# EAGLE board CT_schematic (EAGLE 7.6.0)

Size 100 x 80 mm. Coordinates in mm from the lower left corner, seen from the top.
Outline: 0,0 100,0 100,80 0,80 0,0
Copper layers (1*16): Top 0.035mm / dielectric 1.5mm / Bottom 0.035mm
Design rules "default": minimum track width 10mil, minimum drill 24mil, track to track 8mil, track to pad 8mil, pad to pad 8mil, via to via 8mil, smd to smd 8mil, copper to edge 40mil, drill to drill 8mil, minimum pad ring 10mil, minimum via ring 8mil, stop-mask expansion 4mil, vias tented up to drill 0mil, thermal gap 10mil

## Footprints (pad centres in the part's own frame; a part is rotated, then mirrored left to right if it is on the bottom)
C0603 = smd 0.8 x 0.8: 1 -0.762,0; 2 0.762,0
C0402 = smd 0.5 x 0.5: 1 -0.508,0; 2 0.508,0
C1210 = smd 1.2 x 2.5: 1 -1.524,0; 2 1.524,0
C1206 = smd 1.3 x 1.6: 1 -1.524,0; 2 1.524,0
L0603 = smd 0.8 x 0.8: 1 -0.762,0; 2 0.762,0
R0603 = smd 0.8 x 0.8: 1 -0.762,0; 2 0.762,0
WLCSP25 = smd 0.32 x 0.32: A1 -0.8,0.8; A2 -0.4,0.8; A3 0,0.8; A4 0.4,0.8; A5 0.8,0.8; B1 -0.8,0.4; B2 -0.4,0.4; B3 0,0.4; B4 0.4,0.4; B5 0.8,0.4; C1 -0.8,0; C2 -0.4,0; C3 0,0; C4 0.4,0; C5 0.8,0; D1 -0.8,-0.4; D2 -0.4,-0.4; D3 0,-0.4; D4 0.4,-0.4; D5 0.8,-0.4; E1 -0.8,-0.8; E2 -0.4,-0.8; E3 0,-0.8; E4 0.4,-0.8; E5 0.8,-0.8
ETRX3587 = smd 1 x 1.4: 1 0,0; 2 1.27,0; 3 2.54,0; 4 3.81,0; 5 5.08,0; 6 6.35,0; 7 7.62,0; 8 8.89,0; 9 10.16,0; 10 11.43,0; 11 12.7,0; 12 13.97,0; 13 15.24,0; 14 16.51,0; 15 17.78,0; 16 19.05,0; 17 20.32,0; 18 21.59,0; 19 22.86,0; 20 22.86,18.8; 21 21.59,18.8; 22 20.32,18.8; 23 19.05,18.8; 24 17.78,18.8; 25 16.51,18.8; 26 15.24,18.8; 27 13.97,18.8; 28 12.7,18.8; 29 11.43,18.8; 30 10.16,18.8; 31 8.89,18.8; 32 7.62,18.8; 33 6.35,18.8
DFN8-S = smd 0.6 x 0.4: 1 -2.69,1.905; 2 -2.69,0.635; 3 -2.69,-0.635; 4 -2.69,-1.905; 5 2.69,-1.905; 6 2.69,-0.635; 7 2.69,0.635; 8 2.69,1.905
ABS07-32.768KHZ-7-T = smd 1.1 x 2.4: 1 -2.5,0; 2 0,0
ASFL1 = smd 1.7 x 1.5: 1 -1.27,-1.1; 2 1.27,-1.1; 3 1.27,1.1; 4 -1.27,1.1
SOIC-8_EP = smd 1.6 x 0.533: 1 -2.921,1.905; 2 -2.921,0.635; 3 -2.921,-0.635; 4 -2.921,-1.905; 5 2.921,-1.905; 6 2.921,-0.635; 7 2.921,0.635; 8 2.921,1.905 | smd 2.54 x 3.302: EPAD 0,0 | drill 0.406 pad 0.406: P$1 -0.508,0.635; P$2 0.381,0.635; P$3 -0.508,-0.635; P$4 0.381,-0.635
DFN8_2X3MC = smd 0.813 x 0.305: 1 -1.398,0.75; 2 -1.398,0.25; 3 -1.398,-0.25; 4 -1.398,-0.75; 5 1.398,-0.75; 6 1.398,-0.25; 7 1.398,0.25; 8 1.398,0.75 | smd 1.753 x 1.549: 9 0,0
JST-2-SMD = smd 1 x 4.6: 1 -1,-3.7; 2 1,-3.7 | smd 1.6 x 3.4: NC1 -3.4,1.5; NC2 3.4,1.5
FCI_10118193-0001LF = smd 0.4 x 1.35: 1 -1.3,2.675; 2 -0.65,2.675; 3 0,2.675; 4 0.65,2.675; 5 1.3,2.675 | smd 1.6 x 1.4: 6 -3.2,2.45; 7 3.2,2.45 | smd 1.9 x 1.9: 8 -1.2,0; 9 1.2,0 | hole 0.5: -3.3,0; 3.3,0
SON-6 = smd 0.55 x 0.3: 1 -0.355,0.5 | smd 0.52 x 0.3: 2 -0.37,0; 3 -0.37,-0.5; 4 0.37,-0.5; 5 0.37,0; 6 0.37,0.5
SW_4-1437565-2 = smd 1.4 x 2.1: 1 -2.23,4.55; 2 -2.23,-4.55; 3 2.23,4.55; 4 2.23,-4.55
LGM67K-G1J2-24-Z = smd 0.8 x 1.4: A -2,0; C 0,0
NC7SZ125M5X = smd 1.3 x 0.7: 1 -1.3,0.95; 2 -1.3,0; 3 -1.3,-0.95; 4 1.3,-0.95; 5 1.3,0.95
DUMMY_PACKAGE_122 = drill 0.3: 1 0,-1; 2 1.5,-1; 3 3,-1

## Placement (x,y rotation side)
C1  1e-07  [C0603]  -43.18,59.69 0 top  (outside the outline)
C2  1e-07  [C0603]  -46.99,59.69 0 top  (outside the outline)
C3  1e-07  [C0603]  -50.8,59.69 0 top  (outside the outline)
C4  1e-07  [C0603]  -54.61,59.69 0 top  (outside the outline)
C5  4.7e-06  [C0603]  -39.37,59.69 0 top  (outside the outline)
C6  1e-08  [C0603]  -58.42,59.69 0 top  (outside the outline)
C7  1e-06  [C0603]  -62.23,59.69 0 top  (outside the outline)
C8  1e-11  [C0402]  -49.53,64.77 0 top  (outside the outline)
C9  1e-11  [C0402]  -53.34,64.77 0 top  (outside the outline)
C10  1e-07  [C0402]  -57.15,64.77 0 top  (outside the outline)
C11  1e-08  [C0402]  -60.96,64.77 0 top  (outside the outline)
C12  1e-08  [C0402]  -64.77,64.77 0 top  (outside the outline)
C13  1e-05  [C1210]  -29.21,48.26 0 top  (outside the outline)
C14  1e-05  [C1210]  -35.56,48.26 0 top  (outside the outline)
C15  1e-05  [C1210]  -41.91,48.26 0 top  (outside the outline)
C16  1e-05  [C1210]  -48.26,48.26 0 top  (outside the outline)
C17  1e-07  [C0402]  -15.24,69.85 0 top  (outside the outline)
C18  1e-05  [C1206]  -54.61,48.26 0 top  (outside the outline)
C19  1e-05  [C1206]  -60.96,48.26 0 top  (outside the outline)
C20  1e-08  [C0402]  -19.05,69.85 0 top  (outside the outline)
C21  1e-08  [C0402]  -22.86,69.85 0 top  (outside the outline)
F1  240.0  [L0603]  -66.04,59.69 0 top  (outside the outline)
R1  10000.0  [R0603]  -46.99,54.61 0 top  (outside the outline)
R2  1000.0  [R0603]  -15.24,64.77 0 top  (outside the outline)
R3  1600.5  [R0603]  -19.05,64.77 0 top  (outside the outline)
R4  4700.0  [R0603]  -22.86,64.77 0 top  (outside the outline)
R5  4700.0  [R0603]  -26.67,64.77 0 top  (outside the outline)
R6  2200.0  [R0603]  -30.48,64.77 0 top  (outside the outline)
R7  2200.0  [R0603]  -34.29,64.77 0 top  (outside the outline)
R8  10000.0  [R0603]  -52.07,54.61 0 top  (outside the outline)
R9  10000.0  [R0603]  -57.15,54.61 0 top  (outside the outline)
R10  10000.0  [R0603]  -62.23,54.61 0 top  (outside the outline)
R11  10000.0  [R0603]  -15.24,59.69 0 top  (outside the outline)
R12  10000.0  [R0603]  -20.32,59.69 0 top  (outside the outline)
R13  4031.5447154472  [R0603]  -31.75,54.61 0 top  (outside the outline)
R14  2200.0  [R0603]  -38.1,64.77 0 top  (outside the outline)
R15  10000.0  [R0603]  -25.4,59.69 0 top  (outside the outline)
R16  10000.0  [R0603]  -30.48,59.69 0 top  (outside the outline)
R17  9100.0  [R0603]  -41.91,64.77 0 top  (outside the outline)
R18  680000.0  [R0603]  -36.83,54.61 0 top  (outside the outline)
R19  120000.0  [R0603]  -41.91,54.61 0 top  (outside the outline)
R20  2000.0  [R0603]  -45.72,64.77 0 top  (outside the outline)
R21  10000.0  [R0603]  -35.56,59.69 0 top  (outside the outline)
U1  STM32L031E6Y6  [WLCSP25]  -36.83,68.58 0 top  (outside the outline)
U2  ETRX3587  [ETRX3587]  -48.26,1.27 0 top  (outside the outline)
U3  24AA512-I/MF  [DFN8-S]  -57.15,27.94 0 top  (outside the outline)
U4  ABS07-32.768KHZ-7-T  [ABS07-32.768KHZ-7-T]  -55.88,39.37 0 top  (outside the outline)
U5  ASFL1-12MHZ-NCS  [ASFL1]  -26.67,39.37 0 top  (outside the outline)
U6  MIC5234YME  [SOIC-8_EP]  -64.77,38.1 0 top  (outside the outline)
U7  MCP73831T-2ACI/MC  [DFN8_2X3MC]  -52.07,68.58 0 top  (outside the outline)
U8  S2B-PH-SM4-TB(LF)(SN)  [JST-2-SMD]  -41.91,29.21 0 top  (outside the outline)
U9  10118193-0001LF  [FCI_10118193-0001LF]  -35.56,39.37 0 top  (outside the outline)
U10  TPS3895ADRYR  [SON-6]  -45.72,68.58 0 top  (outside the outline)
U11  4-1437565-2  [SW_4-1437565-2]  -27.94,29.21 0 top  (outside the outline)
U12  Q65110A2395  [LGM67K-G1J2-24-Z]  -17.78,48.26 0 top  (outside the outline)
U13  nc7sz125m5x  [NC7SZ125M5X]  -15.24,53.34 0 top  (outside the outline)
U14  nc7sz125m5x  [NC7SZ125M5X]  -21.59,53.34 0 top  (outside the outline)
U15  Dummy  [DUMMY_PACKAGE_122]  -43.18,69.85 0 top  (outside the outline)

## Library data of the parts
C1-C21 F1 R1-R21 U1-U15 = circuit_tree

## Nets
CLK_CRYSTAL_U1_B5: C8.1 U1.B5 U4.1
CLK_CRYSTAL_U1_C5: C9.1 U1.C5 U4.2
GND: C1.2 C2.2 C3.2 C4.2 C5.2 C6.2 C7.2 C8.2 C9.2 C10.2 C11.2 C12.2 C13.2 C14.2 C15.2 C16.2 C17.2 C18.2 C19.2 C20.2 C21.2 R2.2 R8.2 R9.2 R12.2 R14.2 R17.2 R19.2 R20.2 U1.E1 U2.1 U2.13 U2.19 U2.20 U2.31 U2.33 U3.4 U3.7 U5.2 U6.7 U6.EPAD U7.6 U7.9 U8.2 U9.5 U9.6 U9.7 U9.8 U9.9 U10.2 U12.C U13.1 U13.3 U14.1 U14.3 U15.1
INPUT_USBPOWER_5V: C18.1 R21.2 U7.1 U7.2 U9.1
NET_U1_A3: R6.1 U1.A3 U3.6
NET_U1_A4: R7.1 U1.A4 U3.5
NET_U1_A5: R8.1 U1.A5
NET_U1_C4: C6.1 C7.1 F1.1 U1.C4
NET_U1_D5: R5.1 U1.D5 U14.4
NET_U1_E4: R3.1 U1.E4 U12.A
NET_U1_E5: R1.1 U1.E5 U5.3 U11.3 U11.4
NET_U2_7: R4.1 U2.7 U13.4
NET_U2_21: R9.1 U2.21
NET_U3_1: R10.1 U3.1
NET_U3_2: R11.1 U3.2
NET_U3_3: R12.1 U3.3
NET_U6_4: R13.2 R14.1 U6.4
NET_U7_5: R21.1 U7.5
NET_U7_8: R20.1 U7.8
NET_U10_1: R16.1 R17.1 U10.1
NET_U10_3: R18.2 R19.1 U10.3
NET_U10_4: R15.1 U10.4 U13.2 U14.2
NET_U11_1: R2.1 U11.1 U11.2
PROC_LPUART1_CTS: U1.E3 U2.8
PROC_LPUART1_RTS: U1.D2 U2.6
PROC_LPUART1_RX: U1.A1 U2.17
PROC_LPUART1_TX: U1.A2 U2.18
PROC_TIM2_CH2: U1.B2 U15.3
PROC_TIM2_CH3: U1.D4 U15.2
VCC_S1_3V7: C13.1 C14.1 C19.1 U6.5 U6.8 U7.3 U7.4 U8.1
VCC_TIER1_3V3: C1.1 C2.1 C3.1 C4.1 C5.1 C10.1 C11.1 C12.1 C15.1 C16.1 C17.1 C20.1 C21.1 F1.2 R1.2 R3.2 R4.2 R5.2 R6.2 R7.2 R10.2 R11.2 R13.1 R15.2 R16.2 R18.1 U1.D1 U2.32 U3.8 U5.4 U6.1 U10.6 U13.5 U14.5

## Tracks (layer width: path | path; a pad name or v marks a point on that pad's centre or on a via)
CLK_CRYSTAL_U1_B5  (2 unrouted)
CLK_CRYSTAL_U1_C5  (2 unrouted)
GND  (55 unrouted)
INPUT_USBPOWER_5V  (4 unrouted)
NET_U1_A3  (2 unrouted)
NET_U1_A4  (2 unrouted)
NET_U1_A5  (1 unrouted)
NET_U1_C4  (3 unrouted)
NET_U1_D5  (2 unrouted)
NET_U1_E4  (2 unrouted)
NET_U1_E5  (4 unrouted)
NET_U2_7  (2 unrouted)
NET_U2_21  (1 unrouted)
NET_U3_1  (1 unrouted)
NET_U3_2  (1 unrouted)
NET_U3_3  (1 unrouted)
NET_U6_4  (2 unrouted)
NET_U7_5  (1 unrouted)
NET_U7_8  (1 unrouted)
NET_U10_1  (2 unrouted)
NET_U10_3  (2 unrouted)
NET_U10_4  (3 unrouted)
NET_U11_1  (2 unrouted)
PROC_LPUART1_CTS  (1 unrouted)
PROC_LPUART1_RTS  (1 unrouted)
PROC_LPUART1_RX  (1 unrouted)
PROC_LPUART1_TX  (1 unrouted)
PROC_TIM2_CH2  (1 unrouted)
PROC_TIM2_CH3  (1 unrouted)
VCC_S1_3V7  (7 unrouted)
VCC_TIER1_3V3  (33 unrouted)